# Altium PCB MB1296-STM32_LRA_Disco_revD1.PcbDoc (part 3 of 3)
Units mm, origin at the board's own origin, x right, y up, seen from the top; angles counter-clockwise.
Board outline 65.06 x 95.02 mm, 4 copper layers (Top Layer, GND, VCC, Bottom Layer), stack 1.037 mm thick; 180 components, 128 nets, 710 pads, 1005 vias.
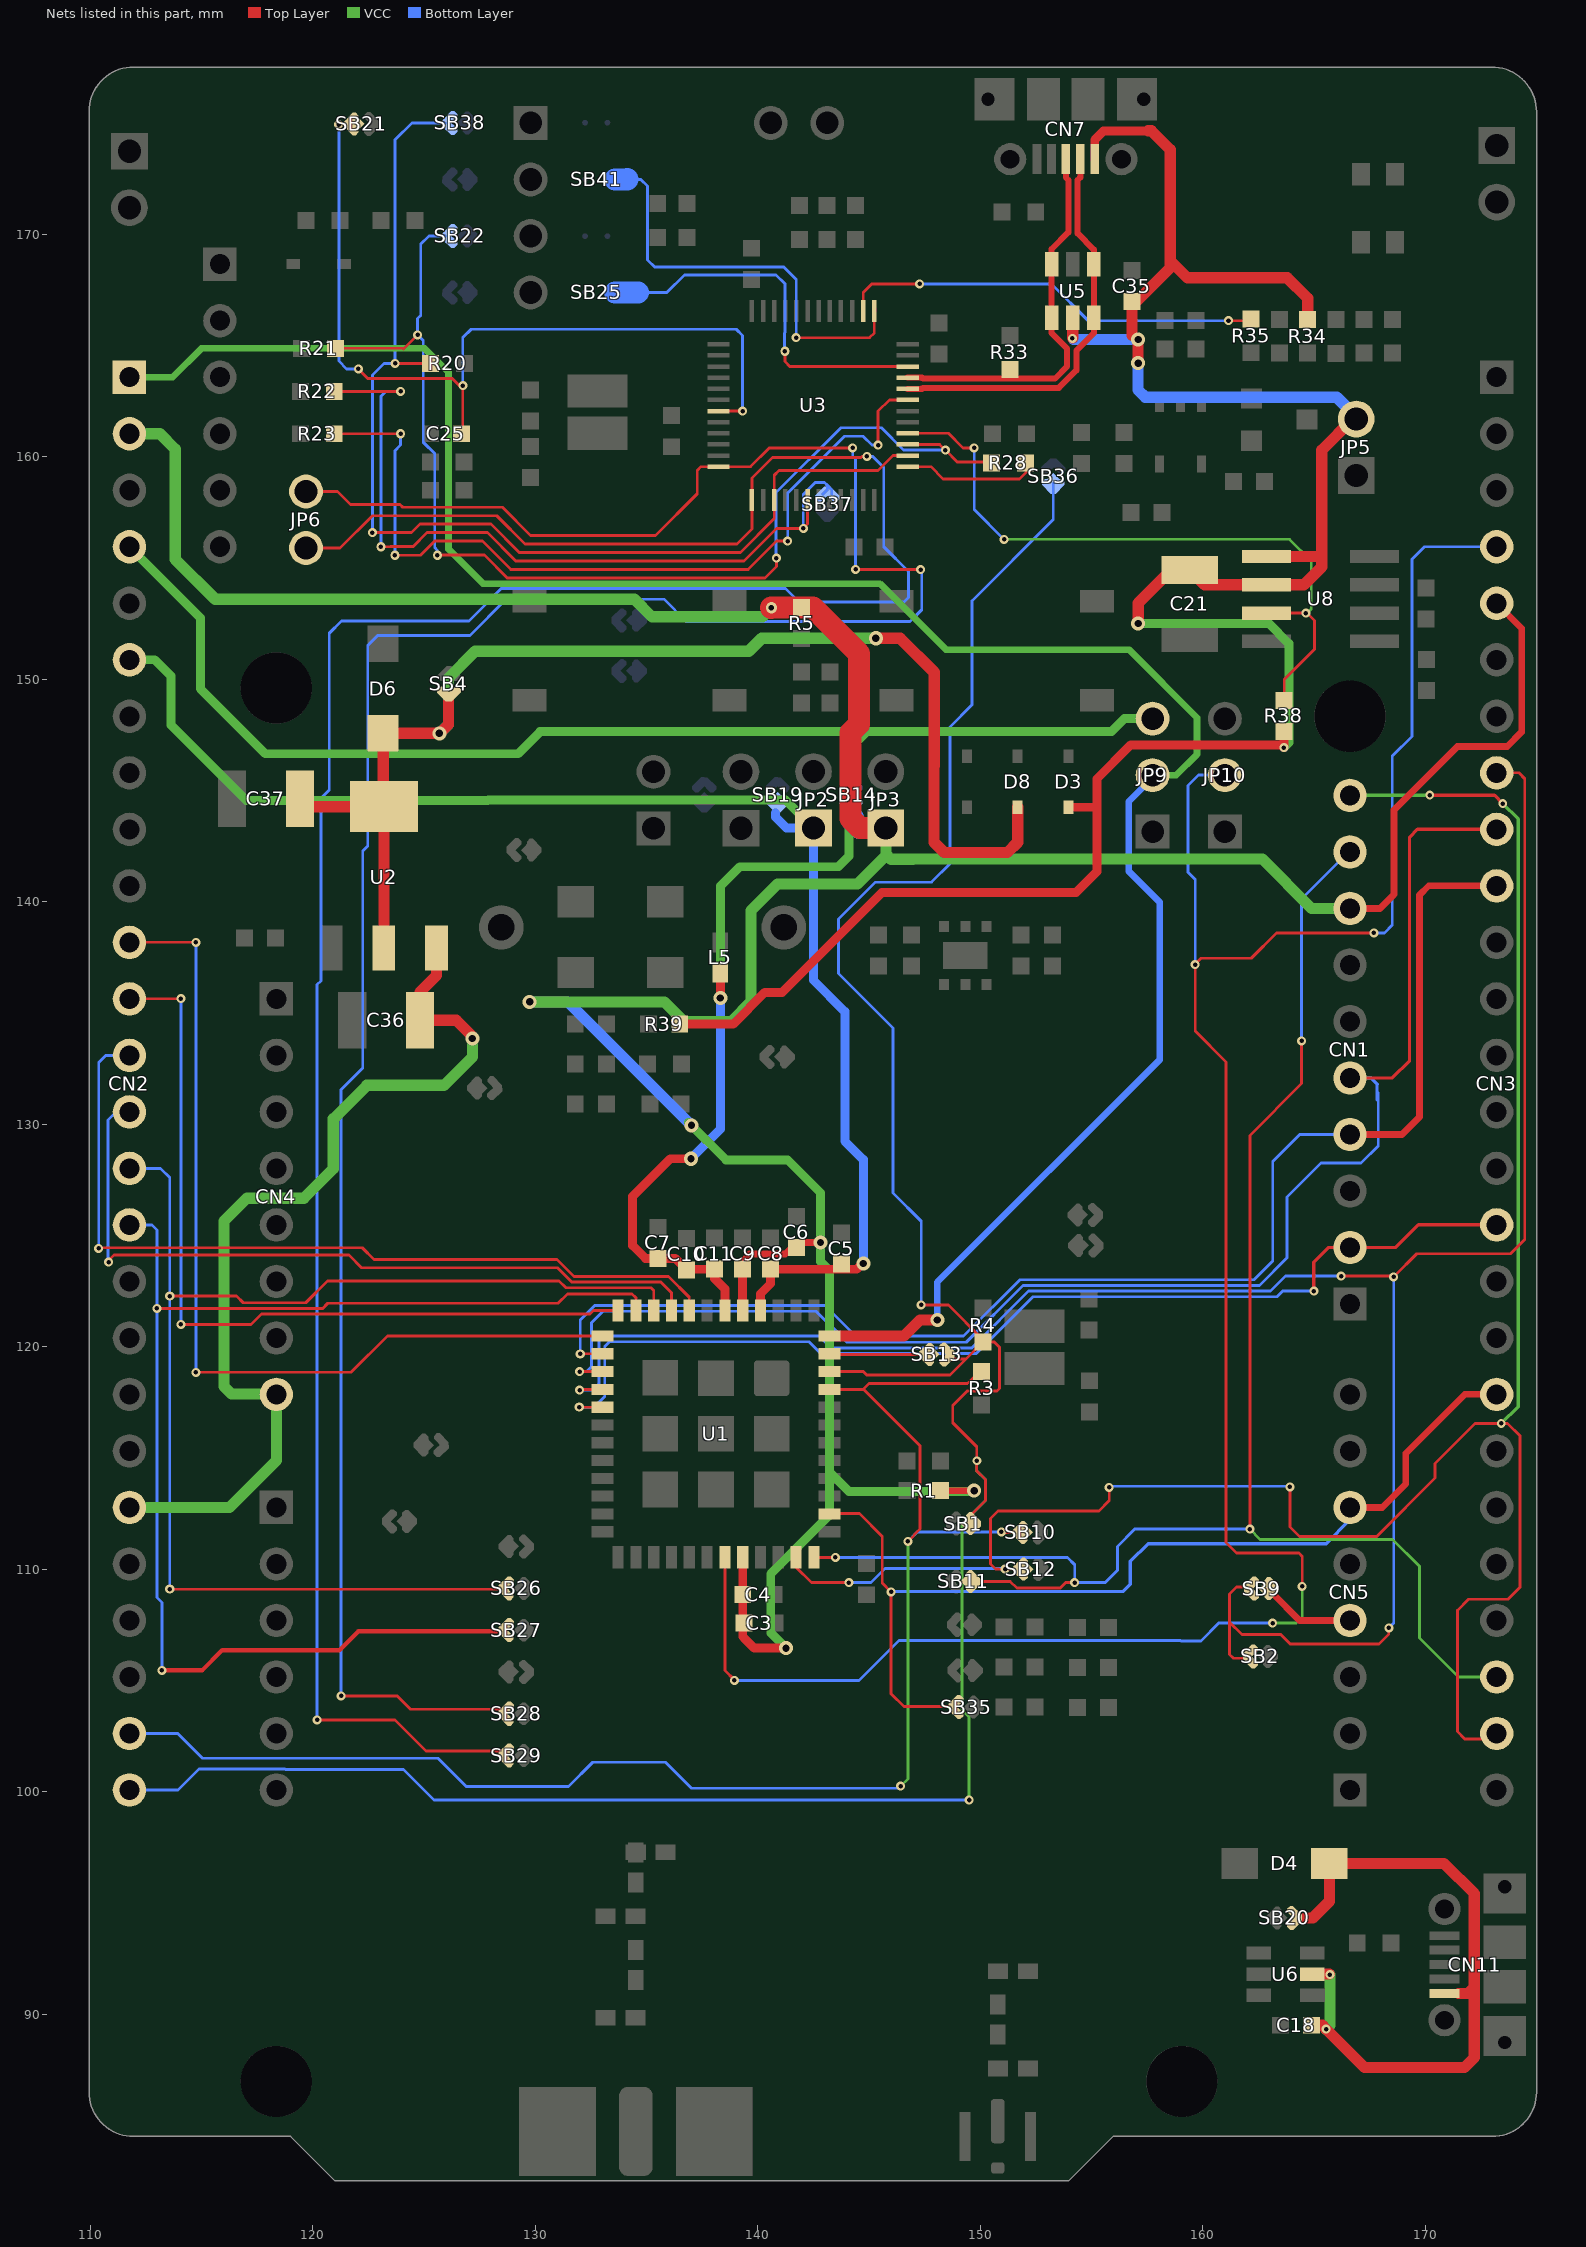
[diagram p5: the nets of this part, all layers, seen from the top]

## Via types
v1: diameter 0.406, hole 0.203, Top Layer to Bottom Layer, tented both sides, 496 vias
v2: diameter 0.5, hole 0.25, Top Layer to Bottom Layer, tented both sides, 413 vias
v3: diameter 0.635, hole 0.33, Top Layer to Bottom Layer, tented both sides, 53 vias
v4: diameter 0.4, hole 0.203, Top Layer to Bottom Layer, tented both sides, 43 vias

## Nets (pads, with @x,y where several pads share a name; then routed paths per layer and width w, separated by ;. In a path a pad name is that pad's centre, name@x,y a point inside that pad or via, vN(x,y) a via of type N, cw(c..) or ccw(c..) an arc to the next point about the centre after c; other vN are vias at no path point) (continued)
PB7: CN3.19 CN5.6 SB35.1 U1.38 | length 45.1
  Top Layer w0.127: U1.38@143.227,112.481 143.246,112.5 144.575,112.5 145.6,111.475 145.6,109.375 v1(146,108.975) 146,104.4 146.575,103.825 SB35.1@148.74,103.825
  Top Layer w0.3: CN5.6@166.624,112.776 168.073,112.776 169.136,113.839 169.136,115.211 171.781,117.856 CN3.19@172.725,117.856
  Bottom Layer w0.15: v1@146.02,108.995 156.42,108.995 156.75,109.325 156.75,110.35 157.55,111.15 165.55,111.15 166.624,112.224 CN5.6@166.624,112.776
PB8: CN1.10 CN3.25 SB12.2 U1.35 | length 95.8
  Top Layer w0.127: U1.35@141.727,110.531 141.727,110.089 142.416,109.4 v1(144.1,109.4) ; 150.852,110 v1(151.125,110) 151.65,110 151.818,110.168 SB12.2@151.818,110.178 ; 150.852,110.006 150.684,110.006 150.46,110.23 150.46,112.27 150.81,112.62 155.34,112.62 155.8,113.08 v1(155.8,113.675) v1@155.8,113.725 ; v1(163.925,113.7) 163.925,111.9 164.35,111.475 167.825,111.475 170.45,114.1 170.45,114.75 172.25,116.55 v4(173.425,116.55) 173.71,116.55 174.26,116 174.26,109.19 173.72,108.65 171.95,108.65 171.45,108.15 171.45,102.7 171.785,102.365 CN3.25@172.725,102.365
  Top Layer w0.15: v4@170.21,144.78 173.12,144.78 v4(173.49,144.41)
  VCC w0.15: CN1.10@166.634,144.79 v4(170.21,144.79) ; v4(173.425,116.55) 174.18,117.305 174.18,143.72 v4(173.49,144.41)
  Bottom Layer w0.127: v1(144.1,109.4) 145.1,109.4 145.725,110.025 151.1,110.025 v1(151.125,110) ; v1@155.8,113.725 v1@163.925,113.725
PB9: CN1.9 CN3.24 SB11.2 U1.36 | length 75
  Top Layer w0.127: U1.36@142.527,110.531 v1(143.494,110.531) ; SB11.2@149.18,109.45 151.35,109.45 151.65,109.15 153.6,109.15 153.85,109.4 v1(154.25,109.4) ; v1(162.125,111.8) 162.125,129.5 164.45,131.825 v1(164.45,133.75)
  VCC w0.127: v1(162.125,111.8) 162.585,111.34 168.54,111.34 169.75,110.13 169.75,106.9 171.494,105.156 CN3.24@172.725,105.156
  Bottom Layer w0.127: v1(143.494,110.531) 153.919,110.531 154.25,110.2 v1(154.25,109.4) 155.625,109.4 156.175,109.95 156.175,111.025 156.95,111.8 v1(162.125,111.8) ; v1(164.45,133.75) 164.45,140.125 166.565,142.24 CN1.9@166.624,142.24
PB12: CN1.2 CN3.16 U1.17 | length 47.7
  Top Layer w0.127: v1(131.981,117.281) U1.17@133.027,117.281
  Top Layer w0.15: v1(165,122.5) 165,123.8 165.66,124.46 CN1.2@166.624,124.46 168.685,124.46 169.701,125.476 CN3.16@172.725,125.476
  Bottom Layer w0.127: v1(131.981,117.281) 132.656,117.281 133.129,117.754 133.129,120.004 133.346,120.221 142.304,120.221 142.833,119.692 149.822,119.692 152.378,122.247 163.347,122.247 163.6,122.5 v1(165,122.5)
PB13: CN3.8 SB2.1 SB9.1 U1.16 | length 98.5
  Top Layer w0.127: v1@132.031,118.081 U1.16@133.027,118.081 ; SB9.1@161.915,109.2 161.525,109.2 161.212,108.887 161.212,107.618 ; SB2.1@162.143,105.797 161.94,106 161.375,106 161.212,106.163 161.212,107.618 ; v1(166.225,123.175) 168.625,123.175 169.625,124.175 173.835,124.175 174.48,124.82 174.48,145.53 174.214,145.796 CN3.8@173.22,145.796 ; v1(168.37,107.36) 168.37,107.08 167.921,106.631 163.939,106.631 163.51,107.06 161.77,107.06 161.212,107.618
  Bottom Layer w0.127: v1(132,118.05) 132.575,118.05 132.875,118.35 132.875,120.329 133.021,120.475 142.771,120.475 143.3,119.946 149.622,119.946 152.178,122.501 163.051,122.501 163.725,123.175 v1(166.225,123.175) ; v1(168.37,107.36) 168.59,107.58 v1(168.59,123.14) v1@168.625,123.175
PB13/NC: CN5.4 SB9.2 | length 4
  Top Layer w0.3: SB9.2@163.107,108.947 164.358,107.696 CN5.4@166.624,107.696
PB14: CN1.5 CN3.9 U1.15 | length 66.1
  Top Layer w0.127: v1@132.006,118.881 U1.15@133.027,118.881
  Top Layer w0.15: CN1.5@166.624,132.08 168.53,132.08 169.3,132.85 169.3,142.9 169.656,143.256 CN3.9@172.725,143.256
  Bottom Layer w0.127: v1(132,118.875) 132.3,118.875 132.525,119.1 132.525,121.075 133.046,121.596 142.629,121.596 144.025,120.2 149.372,120.2 151.928,122.755 162.555,122.755 163.8,124 163.8,126.725 165.325,128.25 167.125,128.25 167.894,129.019 167.894,131.05 ; 167.842,131.8 167.842,131.102 167.894,131.05 ; 167.894,131.406 167.894,131.05
  Bottom Layer w0.15: CN1.5@166.624,132.08 167.562,132.08 167.842,131.8
PB15: CN1.4 CN3.10 U1.14 | length 60.9
  Top Layer w0.127: v1(132.025,119.681) U1.14@133.027,119.681
  Top Layer w0.3: CN1.4@166.624,129.54 168.965,129.54 169.75,130.325 169.75,140.3 170.166,140.716 CN3.10@172.725,140.716
  Bottom Layer w0.127: v1(132.025,119.681) 132.025,121.2 132.675,121.85 143.025,121.85 144.394,120.481 149.256,120.481 151.784,123.009 162.309,123.009 163.155,123.855 163.155,128.33 164.365,129.54 CN1.4@166.624,129.54
PH0: CN2.26 R4.2 SB1.2 SB13.1 SB36.2 U1.46 | length 122.1
  Top Layer w0.127: U1.46@143.227,118.881 144.744,118.881 144.9,118.725 148.639,118.725 149.367,119.453 ; v1(147.35,121.875) 148.575,121.875 150.12,120.33 R4.2@150.12,120.206 ; SB13.1@148.509,119.453 149.367,119.453 ; SB1.2@149.18,112.05 149.202,112.05 150.239,113.087 150.239,114.031 149.85,114.42 v4(149.85,114.875) 149.85,115.5 148.77,116.58 148.77,117.36 149.42,118.01 150.76,118.01 150.865,118.115 150.865,119.974 150.633,120.206 R4.2@150.12,120.206 ; 149.367,119.453 R4.2@150.12,120.206
  VCC w0.127: v4(149.5,99.625) 149.5,103.35 149.18,103.67 149.18,112.028 150.239,113.087 150.239,114.031 149.85,114.42 v4(149.85,114.875)
  Bottom Layer w0.127: CN2.26@111.76,100.076 113.951,100.076 114.892,101.017 118.754,101.017 118.77,101 124.075,101 125.45,99.625 v4(149.5,99.625) ; v1(147.35,121.875) 147.35,125.64 146.08,126.91 146.08,134.32 143.63,136.77 143.63,139.22 145.29,140.88 147.814,140.88 148.641,141.707 148.641,147.857 149.64,148.856 149.64,153.526 153.289,157.175 SB36.2@153.289,158.801
PH1: CN2.25 R3.2 SB10.2 U1.45 | length 68.5
  Top Layer w0.127: U1.45@143.227,118.081 144.731,118.081 ; v1(146.75,111.25) 147.3,111.8 147.3,115.55 144.769,118.081 144.731,118.081 ; R3.2@150.067,118.988 149.43,118.35 145,118.35 144.731,118.081 ; v1(150.95,111.675) 150.975,111.65 SB10.2@151.92,111.65
  VCC w0.127: v4(146.425,100.25) 146.75,100.575 v1(146.75,111.25)
  Bottom Layer w0.127: CN2.25@111.76,102.616 113.934,102.616 115.05,101.5 125.635,101.5 126.9,100.235 131.5,100.235 132.584,101.319 135.859,101.319 137.027,100.15 146.325,100.15 v4(146.425,100.25) ; v1(146.75,111.25) 147.175,111.675 v1(150.95,111.675)
PWR_ENN: R38.1 U3.28 U8.3 | length 31.1
  Top Layer w0.127: U3.28@146.744,161.056 148.57,161.056 149.225,160.401 v1(149.733,160.401) ; U8.3@162.875,152.975 164.695,152.975 165.03,152.64 165.03,151.35 163.67,149.99 163.67,148.938 R38.1@163.688,148.92
  VCC w0.127: v4(151.08,156.29) 163.9,156.29 164.88,155.31 164.88,153.16 v4@164.695,152.975
  Bottom Layer w0.127: v1(149.733,160.401) 149.733,157.637 v4(151.08,156.29)
  other v4: 164.64,152.975
STLINK_RX: JP6.1 SB29.1 U3.13 | length 121.7
  Top Layer w0.127: JP6.1@119.7,155.9 121.229,155.9 122.682,157.353 128.27,157.353 129.54,156.083 139.065,156.083 139.744,156.762 U3.13@139.744,158.056 139.744,159.044 140.667,159.967 144.647,159.967 144.7,160.02 ; v1(120.2,103.225) 123.7,103.225 125.1,101.825 SB29.1@128.7,101.825
  Bottom Layer w0.127: v1(120.2,103.225) 120.2,136.274 120.369,136.443 120.369,144.65 120.744,145.025 120.744,152.069 121.3,152.625 127.025,152.625 128.478,154.077 141.247,154.077 141.85,153.475 146.575,153.475 146.775,153.675 146.775,154.85 145.669,155.956 145.669,159.512 145.174,160.007 144.92,160.007 v1(144.907,160.02)
STLINK_TX: JP6.2 SB28.1 U3.12 | length 119.7
  Top Layer w0.127: JP6.2@119.7,158.44 121.121,158.44 121.7,157.861 123.923,157.861 124.05,157.734 128.524,157.734 129.794,156.464 135.412,156.464 137.287,158.339 137.287,159.385 137.458,159.556 U3.12@138.244,159.556 139.675,159.556 140.52,160.401 v1(144.272,160.401) ; v1(121.275,104.3) 123.8,104.3 124.397,103.703 SB28.1@128.7,103.703 ; v1(144.399,154.94) v1@147.31,154.94
  Bottom Layer w0.127: v1(121.275,104.3) 121.275,131.55 122.25,132.525 122.25,142.275 122.475,142.5 122.475,151.525 122.921,151.971 127.071,151.971 128.7,153.6 135.782,153.6 136.779,152.603 146.853,152.603 147.375,153.125 147.375,154.875 v1(147.325,154.925) ; v1(144.272,160.401) 144.272,160.02 144.399,159.893 v1(144.399,154.94)
STM_JTCK: SB41.2 U3.37 | length 20
  Top Layer w0.127: v1(141.732,165.354) 145.034,165.354 145.244,165.564 U3.37@145.244,166.556 ; U3.37@145.288,166.556 U3.37@145.288,166.624
  Bottom Layer w0.127: SB41.2@133.299,172.466 134.747,172.466 135.049,172.164 135.049,168.851 135.375,168.525 141.175,168.525 141.732,167.968 v1(141.732,165.354)
  Bottom Layer w1: 133.604,172.466 134.133,172.47
STM_JTMS: SB25.2 U3.34 | length 18.6
  Top Layer w0.127: v1(141.224,164.745) 141.224,164.276 141.444,164.056 U3.34@146.744,164.056
  Bottom Layer w0.127: SB25.2@133.299,167.386 135.915,167.386 136.704,168.175 140.825,168.175 141.224,167.776 141.224,165.582 141.211,165.57 141.211,164.757 v1(141.224,164.745)
  Bottom Layer w1: 133.604,167.386 134.616,167.39
STM_RST: C25.2 SB21.2 U3.7 | length 39
  Top Layer w0.127: v1(121.165,174.935) 121.58,174.935 SB21.2@121.733,174.782 ; v1(122.05,163.95) 122.475,163.525 126.275,163.525 126.605,163.195 v1(126.746,163.195) 126.746,161.1 C25.2@126.682,161.036 ; U3.7@138.176,162.052 v1(139.319,162.052)
  Bottom Layer w0.127: v1@121.175,174.905 121.175,164.3 121.525,163.95 v1(122.05,163.95) ; v1(126.746,163.195) 126.746,165.354 127.127,165.735 139.04,165.735 139.319,165.456 v1(139.319,162.052)
STSAFE_NRST: CN3.4 JP10.2 U1.31 | length 105.4
  Top Layer w0.127: U1.31@138.527,110.531 138.527,105.45 138.95,105.027 v1(138.95,105) ; v1(164.475,109.225) 164.475,110.575 164.325,110.725 161.525,110.725 161.05,111.2 161.05,132.8 159.668,134.182 159.668,137.193 159.935,137.46 162.185,137.46 163.325,138.6 v4(167.7,138.6)
  VCC w0.127: v1(163.15,107.575) 164.225,107.575 164.475,107.825 v1(164.475,109.225)
  Bottom Layer w0.127: v1(138.95,105) 144.55,105 146.35,106.8 159,106.8 159.025,106.775 159.925,106.775 160.725,107.575 v1(163.15,107.575) ; v1@159.668,137.125 v1(159.668,137.175) 159.668,141.008 159.35,141.325 159.35,145.225 159.815,145.69 JP10.2@161,145.69 ; v4(167.7,138.6) 168.175,138.6 168.525,138.95 168.525,146.55 169.406,147.431 169.406,155.396 169.966,155.956 CN3.4@172.725,155.956
SX1276_DIO0: CN2.11 U1.13 | length 41.3
  Top Layer w0.127: CN2.11@111.76,138.176 v1(114.75,138.175) ; v1(114.75,118.85) 121.725,118.85 123.356,120.481 U1.13@133.027,120.481
  Bottom Layer w0.127: v1(114.75,118.85) v1(114.75,138.175)
SX1276_DIO1: CN2.12 U1.12 | length 36.8
  Top Layer w0.127: CN2.12@111.76,135.636 v1@113.989,135.636 ; v1(114.075,121) 117.225,121 117.692,121.467 132.461,121.467 132.625,121.631 U1.12@133.727,121.631
  Bottom Layer w0.127: v1(114.075,121) v1@114.075,135.625
  other v1: 114.075,135.65
SX1276_DIO2: CN2.13 U1.8 | length 38
  Top Layer w0.127: v1@110.3,124.425 110.325,124.45 122.225,124.45 122.75,123.925 130.984,123.925 131.749,123.16 135.99,123.16 136.927,122.223 U1.8@136.927,121.631
  Bottom Layer w0.127: v1(110.38,124.42) 110.38,132.78 110.696,133.096 CN2.13@111.76,133.096
SX1276_DIO3: CN2.14 U1.9 | length 34.6
  Top Layer w0.127: v1@110.75,123.8 111.075,124.125 121.625,124.125 122.2,123.55 131,123.55 131.644,122.906 135.644,122.906 136.127,122.423 U1.9@136.127,121.631
  Bottom Layer w0.127: v1@110.694,123.856 v1@110.75,123.8 ; v1@110.8,123.8 110.8,130.19 111.166,130.556 CN2.14@111.76,130.556
  other v1: 110.83,123.8
SX1276_DIO4: CN2.15 SB26.1 U1.10 | length 58.7
  Top Layer w0.127: v1(113.575,109.1) 128.531,109.1 SB26.1@128.7,108.932 ; v1(113.575,122.275) 116.575,122.275 116.875,121.975 119.689,121.975 120.672,122.958 131.075,122.958 131.381,122.652 135.202,122.652 135.327,122.527 U1.10@135.327,121.631
  Bottom Layer w0.127: CN2.15@112.1,128.016 113.159,128.016 113.575,127.6 v1(113.575,122.275) v1(113.575,109.1)
SX1276_DIO5: CN2.16 SB27.1 U1.11 | length 59.9
  Top Layer w0.127: v1@113,121.721 120.45,121.721 120.679,121.95 131.025,121.95 131.45,122.375 134.352,122.375 134.527,122.2 U1.11@134.527,121.631
  Top Layer w0.2: v1(113.225,105.45) 115.025,105.45 115.925,106.35 121.2,106.35 122.05,107.2 128.012,107.2 128.553,107.2 SB27.1@128.7,107.053
  Bottom Layer w0.127: CN2.16@111.76,125.476 112.774,125.476 113,125.25 v1(113,121.725) 113,108.725 113.225,108.5 v1(113.225,105.45)
T_JTCK: R20.1 SB38.1 U3.15 U3.26 | length 50.5
  Top Layer w0.127: v1(122.682,156.591) 124.444,156.591 124.825,156.972 128.016,156.972 129.286,155.702 139.223,155.702 140.744,157.223 U3.15@140.744,158.056 140.744,159.169 140.96,159.385 145.415,159.385 146.086,160.056 U3.26@146.744,160.056 ; v1(123.7,164.2) R20.1@125.585,164.2
  Bottom Layer w0.127: v1(122.682,156.591) 122.682,163.682 123.2,164.2 v1(123.7,164.2) 123.7,174.25 124.456,175.006 SB38.1@125.95,175.006
T_JTMS: R21.1 R28.2 SB22.1 U3.27 | length 52.4
  Top Layer w0.127: R21.1@121.025,164.875 124.108,164.875 ; 124.079,164.846 124.108,164.875 ; v1(124.714,165.481) 124.108,164.875 ; v1(125.603,155.575) 125.616,155.588 127.718,155.588 128.747,154.559 140.335,154.559 140.843,155.067 v1(140.843,155.448) ; U3.27@146.744,160.556 148.181,160.556 v1(148.435,160.302) 148.971,159.766 R28.2@150.685,159.766
  Bottom Layer w0.127: v1(125.603,155.575) 125.588,155.59 125.588,155.814 125.489,155.912 125.489,160.134 124.968,160.655 124.968,165.227 v1(124.714,165.481) 124.714,166.212 124.854,166.352 124.854,169.558 125.222,169.926 SB22.1@125.959,169.926 ; v1(140.843,155.448) 140.83,155.461 140.83,158.387 143.746,161.303 145.56,161.303 146.561,160.302 v1(148.435,160.302)
T_NRST: R22.1 SB37.1 U3.18 | length 36.3
  Top Layer w0.127: R22.1@120.968,162.941 v1(123.952,162.941) ; v1(123.063,155.956) 123.49,155.956 123.502,155.969 124.519,155.969 125.141,156.591 127.858,156.591 129.128,155.321 139.381,155.321 140.843,156.784 v1(142.052,156.784) 142.244,156.976 U3.18@142.244,158.056
  Bottom Layer w0.127: v1(123.063,155.956) 123.076,155.969 123.076,162.724 123.292,162.941 v1(123.952,162.941) ; v1(142.052,156.784) 142.052,158.308 142.591,158.847 143,158.847 143.129,158.718 ; SB37.1@142.926,158.318 143.129,158.521 143.129,158.718 ; SB37.1@143.332,158.318 143.332,158.515 143.129,158.718
T_SWDIO_IN: R28.1 U3.25 | length 6.1
  Top Layer w0.127: U3.25@146.744,159.556 147.784,159.556 148.336,159.004 151.765,159.004 152.082,159.321 R28.1@152.082,159.766
T_SWO: R23.1 U3.31 | length 38
  Top Layer w0.127: R23.1@120.968,161.036 v1(123.952,161.036) ; v1(123.698,155.575) 124.85,155.575 125.485,156.21 127.635,156.21 128.905,154.94 139.573,154.94 140.843,156.21 v1(141.351,156.21) ; v1(145.415,160.528) 145.415,162.052 145.919,162.556 U3.31@146.744,162.556
  Bottom Layer w0.127: v1(123.698,155.575) 123.698,160.274 123.952,160.528 v1(123.952,161.036) ; v1(141.351,156.21) 141.351,158.369 143.904,160.922 144.742,160.922 145.135,160.528 v1(145.415,160.528)
TCXO_OUT: SB13.2 U1.47 | length 4.5
  Top Layer w0.127: U1.47@143.227,119.681 143.252,119.656 SB13.2@147.722,119.656
TCXO_VCC: CN2.1 JP9.2 U1.48 | length 98.2
  Top Layer w0.5: U1.48@143.575,120.481 146.581,120.481 147.3,121.2 v3(148.075,121.2)
  VCC w0.3: CN2.1@111.76,163.576 113.701,163.576 115,164.875 125.025,164.875 126.1,163.8 126.1,155.85 127.65,154.3 145.492,154.3 148.461,151.33 156.69,151.33 159.75,148.27 159.75,146.625 158.815,145.69 JP9.2@158.125,145.69
  Bottom Layer w0.3: v3(148.075,121.2) 148.075,122.9 158.08,132.905 158.08,139.97 156.675,141.375 156.675,144.495 JP9.2@157.87,145.69
U5V: C21.1 C35.2 CN7.1 D3.1 JP5.2 R34.1 R38.2 R39.2 U5.5 U8.1 U8.2 | length 107.1
  Top Layer w0.4: R39.2@136.499,134.5 138.9,134.5 140.325,135.925 141.101,135.925 145.597,140.42 154.314,140.42 155.245,141.351 155.245,145.517 156.778,147.05 163.525,147.05 v4(163.65,146.925) R38.2@163.65,147.652 ; D3.1@153.975,144.247 155.092,144.247 ; CN7.1@155.15,173.375 155.15,174.25 155.55,174.65 157.55,174.65
  Top Layer w0.508: v1@154.164,165.339 U5.5@154.164,166.251 ; 156.825,165.45 C35.2@156.825,166.977 ; C35.2@156.956,166.908 158.539,168.491 158.539,168.825 ; v3(157.099,164.211) v3@157.099,165.176 ; v3(157.1,152.51) 157.1,153.42 158.589,154.909 C21.1@159.425,154.909 160.089,154.245 U8.2@162.875,154.245 164.545,154.245 165.36,155.06 165.36,155.56 ; 157.55,174.65 157.7,174.65 158.539,173.811 158.539,168.825 ; U8.1@162.875,155.515 165.315,155.515 165.36,155.56 ; R34.1@164.719,166.179 164.719,167.132 163.807,168.044 159.32,168.044 158.539,168.825 ; JP5.2@167.005,161.696 166.751,161.696 165.36,160.305 165.36,155.56
  VCC w0.4: v3(157.1,152.51) 162.97,152.51 163.875,151.605 163.875,147.15 v4(163.65,146.925)
  Bottom Layer w0.508: v1@154.2,165.275 v3(157.1,165.275) ; v3(157.099,164.211) 157.099,163.001 157.425,162.675 166.026,162.675 JP5.2@167.005,161.696
  other v1: 154.15,165.325
USB_LRA_5V: C18.2 CN11.1 D4.1 SB20.1 U6.5 | length 30
  Top Layer w0.508: 164.6,94.325 164.95,94.325 165.7,95.075 D4.1@165.7,96.775 170.853,96.775 172.213,95.416 172.213,91.213 ; C18.2@164.898,89.5 165.375,89.5 v1(165.55,89.325) 167.275,87.6 171.764,87.6 172.213,88.048 172.213,91.213 ; U6.5@164.925,91.8 v1@165.7,91.8 ; CN11.1@171.5,90.925 171.925,90.925 172.213,91.213
  VCC w0.508: v1(165.55,89.325) 165.725,89.5 v1(165.725,91.775)
USB_RENUMN: R35.1 U3.38 | length 19.1
  Top Layer w0.127: U3.38@144.744,166.556 144.744,167.386 145.125,167.767 v1@147.275,167.767 ; v1(161.163,166.116) 162.115,166.116 R35.1@162.179,166.179
  Bottom Layer w0.127: v1@147.275,167.767 153.208,167.767 154.859,166.116 v1(161.163,166.116)
  other v1: 147.275,167.775
"USB_STLK _N": CN7.2 U3.32 U5.1 U5.6 | length 18.1
  Top Layer w0.27: U3.32@146.744,163.056 147.382,163.056 147.424,163.097 153.54,163.097 154.325,163.883 154.325,164.77 155.114,165.559 U5.6@155.114,166.251 U5.1@155.114,168.651 155.114,169.311 154.383,170.041 154.383,172.442 154.5,172.558 CN7.2@154.5,173.375
"USB_STLK _P": CN7.3 R33.2 U3.33 U5.3 U5.4 | length 17.7
  Top Layer w0.127: 153.719,165.155 153.9,164.974 153.9,164.924
  Top Layer w0.27: U3.33@146.744,163.556 147.382,163.556 147.424,163.514 153.367,163.514 153.9,164.048 153.9,164.873 153.214,165.559 U5.4@153.214,166.251 U5.3@153.214,168.651 153.214,169.339 153.966,170.091 153.966,172.442 153.85,172.558 CN7.3@153.85,173.375
VDD_MCU_LRA: C3.2 C4.2 C6.1 C9.2 CN1.8 CN2.2 CN3.5 JP3.1 R1.2 R5.2 SB14.2 U1.5 U1.32 | length 174.4
  Top Layer w0.3: C9.2@139.327,123.483 139.327,123.856 139.635,124.164 141.239,124.164 141.757,124.682 v3(142.825,124.682) ; R1.2@148.227,113.531 v3(149.731,113.531) ; CN1.8@166.624,139.7 167.97,139.7 168.6,140.33 168.6,144.13 171.45,146.98 173.69,146.98 174.34,147.63 174.34,152.296 CN3.5@173.22,153.416
  Top Layer w0.4: U1.5@139.327,121.631 C9.2@139.327,123.483 ; 139.329,106.969 U1.32@139.329,110.531 ; 139.377,106.921 139.848,106.45 v3(141.275,106.45)
  Top Layer w1: v2(140.614,153.213) 140.625,153.224 R5.2@141.975,153.224 142.479,153.224 144.551,151.151 144.551,147.978 144.17,147.597 144.17,143.739 144.599,143.31 JP3.1@145.76,143.31
  VCC w0.4: v3@136.9,130.075 138.583,128.392 141.348,128.392 142.825,126.915 v3(142.825,124.682) 142.825,123.832 143.227,123.43 143.227,114.373 ; v3(141.275,106.45) 140.59,107.135 140.59,109.79 143.227,112.427 143.227,114.373 ; v3@149.7,113.5 144.1,113.5 143.227,114.373
  VCC w0.5: v3(129.75,135.5) 135.818,135.5 136.693,134.625 138.815,134.625 139.7,135.51 139.7,139.6 140.9,140.8 144.48,140.8 145.76,142.08 145.76,142.149 ; JP3.1@145.76,143.31 145.76,142.149 ; CN1.8@166.624,139.7 164.897,139.7 162.684,141.913 146.99,141.91 145.999,141.91 145.76,142.149
  VCC w0.508: CN2.2@111.76,161.036 113.132,161.036 113.817,160.35 113.817,155.397 115.621,153.594 134.468,153.594 135.255,152.806 140.208,152.806 v2(140.614,153.213)
  Bottom Layer w0.5: v3(129.75,135.5) 131.475,135.5 v3@136.9,130.075
  Bottom Layer w1: 144.272,143.764 144.272,143.637 144.599,143.31 JP3.1@145.76,143.31
  other v3: 137.025,129.95
VDD_RF_LRA: C7.1 C10.2 C11.2 CN2.4 JP9.3 L5.2 U1.6 | length 90.7
  Top Layer w0.4: v3(137,128.45) 136.07,128.45 134.38,126.76 134.38,124.55 134.959,123.971 C7.1@135.51,123.971 136.288,123.971 C10.2@136.802,123.458 136.827,123.483 C11.2@138.052,123.483 138.052,123.073 138.527,122.598 U1.6@138.527,121.631 ; v3(138.325,135.675) L5.2@138.325,136.829
  VCC w0.4: CN2.4@111.76,155.956 114.95,152.766 114.95,149.575 117.875,146.65 129.23,146.65 130.225,147.645 144.91,147.645 ; v3(138.325,135.675) 138.325,140.7 139.2,141.575 143.625,141.575 144.11,142.06 144.11,146.845 144.91,147.645 ; JP9.3@158.125,148.23 156.485,148.23 155.9,147.645 144.91,147.645
  Bottom Layer w0.4: v3(137,128.45) 138.325,129.775 v3(138.325,135.675)
VDD_USB_LRA: C5.1 C8.2 CN2.6 JP2.1 SB19.2 U1.4 | length 64.6
  Top Layer w0.4: U1.4@140.127,121.631 140.127,122.381 140.577,122.831 C8.2@140.577,123.483 144.454,123.483 v3@144.73,123.759 ; JP2.1@142.51,143.31 JP2.1@142.51,143.83
  VCC w0.4: CN2.6@111.76,150.876 112.899,150.876 113.625,150.15 113.625,147.95 117.03,144.545 127.87,144.545 127.9,144.575 141.245,144.575 JP2.1@142.51,143.31
  Bottom Layer w0.4: 140.8,144 140.8,143.813 141.303,143.31 JP2.1@142.51,143.31 142.51,136.47 143.919,135.061 143.919,129.241 144.75,128.41 v3(144.75,123.74)
VIN: C36.1 CN2.21 CN4.8 U2.3 | length 42.2
  Top Layer w0.5: U2.3@125.562,137.075 125.562,136.687 124.824,135.949 C36.1@124.824,134.675 126.45,134.675 127.175,133.95 v3(127.175,133.85)
  VCC w0.5: CN2.21@111.76,112.776 116.251,112.776 118.364,114.889 CN4.8@118.364,117.856 ; CN4.8@118.35,117.87 116.36,117.87 116.02,118.21 116.02,125.645 117.05,126.675 119.6,126.675 120.925,128 120.925,130.246 122.429,131.75 125.9,131.75 127.175,133.025 v3(127.175,133.85)
VIN_REG_5V: C37.1 D6.1 D8.1 SB4.1 U2.2 | length 56.9
  Top Layer w0.508: C37.1@119.424,144.625 119.774,144.275 U2.2@123.2,144.275 ; U2.2@123.2,137.925 U2.2@123.2,144.275 ; 126.1,149 126.1,147.975 v3(125.692,147.567) D6.1@123.165,147.567 123.165,144.31 U2.2@123.2,144.275 ; v3(145.313,151.841) 146.406,151.841 147.934,150.313 147.934,146.105 147.93,146.101 147.93,142.672 148.387,142.215 151.232,142.215 151.689,142.672 D8.1@151.689,144.247
  VCC w0.508: v3(125.692,147.567) 126.1,147.975 126.1,150.054 127.303,151.257 139.598,151.257 140.183,151.841 v3(145.313,151.841)
pads on no net: U3.4 U3.11 U3.14 U3.16 U3.17 U3.19 U3.21 U3.22 U3.40 U3.41 U3.42 U3.43 U3.45 U3.46 U7.3 U7.5

## Polygon pours and split planes (outlines as drawn)
GND on Top Layer "GND-Top" (solid, remove dead copper, pour order 5): 107.5,82.5 177.5,82.5 177.5,90 177.5,177.5 107.494,177.5 107.494,82.5 107.5,82.5
GND on GND "GND" (solid, remove dead copper, pour order 6): 107.5,82.5 177.5,82.5 177.5,90 177.5,177.5 107.494,177.5 107.494,82.5 107.5,82.5
GND on VCC "GND-VCC" (solid, remove dead copper, pour order 7): 107.493,82.5 177.492,82.5 177.492,90 177.492,177.5 107.487,177.5 107.487,82.5 107.493,82.5
GND on Bottom Layer "GND-Bot" (solid, remove dead copper, pour order 8): 107.508,82.525 177.508,82.525 177.508,90.025 177.508,177.525 107.502,177.525 107.502,82.525 107.508,82.525

## Keep-outs
Keep-Out Layer:
  lines w0.127: 109.945,86.51 109.945,151.8 ; 109.95,86.501 ccw(c111.95,86.501) 111.95,84.501 ; 109.95,151.809 109.95,175.52 ; 109.95,175.5 cw(c111.95,175.5) 111.95,177.5 173.012,177.5 cw(c173.012,175.5) 175.012,175.5 175.012,151.886 175.012,86.5 ; 111.945,84.5 119.005,84.5 121.005,82.5 153.975,82.5 ; 154,82.5 156,84.5 173.011,84.5 ccw(c173.011,86.5) 175.011,86.5

## Other copper
Top Layer:
  pour cut-out: 151.9,83.425 151.9,85.763 149.65,85.763 149.65,83.425
  pour cut-out: 151.125,89.65 151.125,89.875 150.425,89.875 150.425,89.65
  pour cut-out: 135.075,96.925 135.3,96.925 135.3,97.625 135.075,97.625
  pour cut-out: 134.175,96.7 134.175,96.475 134.875,96.475 134.875,96.7
  pour cut-out: 133.525,121.15 133.525,111.025 142.725,111.025 142.725,121.15
  pour cut-out: 134.175,92.325 134.175,92.1 134.875,92.1 134.875,92.325
  text "1" at 164.834,175.982 h1
  text "TOP LAYER" at 213.264,42.875 h0.8
  text ".GTL" at 213.756,37.875 h0.8
GND:
  text "2" at 166.334,175.982 h1
VCC:
  text "3" at 168.234,175.982 h1
Bottom Layer:
  text "4" at 170.534,175.982 h1
  text "BOTTOM LAYER" at 92.264,42.875 h0.8
  text ".GBL" at 91.772,37.875 h0.8
Multi-Layer:
  pour cut-out: 164.334,177.332 164.334,175.332 171.084,175.332 171.084,177.332

## Silkscreen, mask and mechanical layers (free items; w line width, h text height)
Top Overlay:
  circle w0.254: c169.498,173.558 r0.148
  lines w0.076: 119.888,98.806 121.764,98.806 ; 119.888,114.046 121.764,114.046 121.764,110.72 ; 119.888,116.586 122.74,116.59 ; 119.888,129.032 122.64,129.03 ; 121.764,98.801 121.764,107.526 ; 122.64,127.73 122.64,129.032 ; 122.74,116.585 122.74,123.2
  lines w0.127: 136.775,125.8 136.775,126.875 ; 139.375,125.9 139.375,126.975
  lines w0.203: 112.812,143.199 113.371,142.64 ; 112.89,145.83 113.465,146.405
  lines w0.5: 127.254,166.891 127.254,170.307 128.016,170.307 128.016,166.891 127.254,166.891 ; 127.254,172.212 128.016,172.212 128.016,175.654 127.254,175.654 127.254,172.212
  lines w1: 132.161,167.172 132.733,167.172 132.733,170.22 132.161,170.22 132.161,167.172 ; 132.161,172.404 132.733,172.404 132.733,175.452 132.161,175.452 132.161,172.404
  text "1" at 127.83,176.32 h0.8
  text "USB STLINK" at 158.95,174.11 h0.8
  text "SWD" at 114.79,171.5 h0.8
  text "ST-LINK" at 126.4,169.225 h0.6 r90
  text "DISCOVERY" at 134.225,168.825 h0.6 r90
  text "GND" at 171.704,168.656 h0.8
  text "GND" at 110.85,168.475 h0.8
  text "1" at 117.67,168.3 h0.8
  text "COM" at 168,168.2 h0.6
  text "CRF1" at 168.9,162.9 h0.8
  text "CRF2" at 168.6,160.5 h0.8
  text "CRF3" at 168.6,158.2 h0.8
  text "TX" at 121.3,158 h0.8
  text "RESET" at 148.94,155.17 h1.2
  text "USER" at 132.45,155.09 h1.2
  text "RX" at 121.5,154.6 h0.8
  text "GND" at 113.47,152.99 h0.8
  text "USB" at 113.47,150.36 h0.8
  text "GND" at 113.47,148.15 h0.8
  text "PA5" at 169.47,147.8 h0.8
  text "BOOT0" at 113.47,146.81 h0.8
  text "GND" at 131.45,145.97 h0.8
  text "PB13" at 168.739,145.5 h0.8
  text "D15" at 163.01,144.65 h0.8
  text "1" at 162.62,143.155 h0.8
  text "3V3" at 131.54,142.93 h0.8
  text "PB14" at 168.739,142.92 h0.8
  text "1" at 155.85,141.95 h0.8
  text "D14" at 163.023,141.853 h0.8
  text "1" at 133.54,141.77 h0.8
  text "PA13" at 113.47,141.521 h0.8
  text "1" at 147.75,141.375 h0.8
  text "1" at 137.27,141.18 h0.8
  text "1" at 144.03,140.81 h0.8
  text "PB15" at 168.739,140.42 h0.8
  text "PA14" at 113.47,140.295 h0.8
  text "AVDD" at 162.05,139.35 h0.8
  text "PB6" at 169.405,137.79 h0.8
  text "DIO0" at 113.99,137.23 h0.8 r45
  text "GND" at 162.95,136.775 h0.8
  text "GND" at 169.405,135.57 h0.8
  text "1" at 119.93,135.52 h0.8
  text "DIO1" at 113.47,135.25 h0.8
  text "D13" at 163.04,134.2 h0.8
  text "PA9" at 169.405,132.946 h0.8
  text "DIO2" at 113.47,132.66 h0.8
  text "D12" at 163.075,131.775 h0.8
  text "IOREF" at 120.05,131.72 h0.8
  text "PA12" at 168.739,130.26 h0.8
  text "NRST" at 120.06,130.2 h0.8
  text "DIO3" at 113.47,130.05 h0.8
  text "D11" at 163,129.15 h0.8
  text "PA11" at 169.006,127.93 h0.8
  text "3V3" at 120.058,127.618 h0.8
  text "DIO4" at 113.47,127.54 h0.8
  text "MB1296D" at 148.565,127.54 h1
  text "D10" at 162.975,126.8 h0.8
  text "PB12" at 168.739,125.27 h0.8
  text "5V" at 120.058,125.12 h0.8
  text "DIO5" at 113.47,125.04 h0.8
  text "D9" at 163.375,123.875 h0.8
  text "POWER" at 123.13,123.69 h0.8 r90
  text "GND" at 120.058,122.76 h0.8
  text "PB2" at 169.39,122.58 h0.8
  text "GND" at 113.47,122.51 h0.8
  text "D8" at 163.547,121.608 h0.8
  text "GND" at 120.058,120.18 h0.8
  text "1" at 164.74,120.14 h0.8
  text "NRST" at 113.47,120.01 h0.8
  text "PA8" at 169.405,119.96 h0.8
  text "D7" at 163.526,117.544 h0.8
  text "PB7" at 169.405,117.52 h0.8
  text "3V3" at 113.47,117.42 h0.8
  text "VIN" at 120.058,117.4 h0.8
  text "PWM/D6" at 160.32,115.004 h0.8
  text "PB5" at 169.405,114.952 h0.8
  text "5V" at 113.47,114.92 h0.8
  text "1" at 116.48,113.8 h0.8
  text "PWM/D5" at 160.292,112.464 h0.8
  text "VIN" at 113.47,112.44 h0.8
  text "PA10" at 168.739,112.434 h0.8
  text "A0" at 120.048,112.314 h0.8
  text "D4" at 163.497,109.924 h0.8
  text "PA2" at 169.405,109.93 h0.8
  text "A1" at 120.048,109.774 h0.8
  text "GND" at 113.47,109.76 h0.8
  text "AIN" at 122.26,108.25 h0.8 r90
  text "PA0" at 113.47,107.38 h0.8
  text "PWM/D3" at 160.292,107.384 h0.8
  text "PA3" at 169.405,107.39 h0.8
  text "A2" at 120.048,107.234 h0.8
  text "PB9" at 169.405,104.91 h0.8
  text "D2" at 163.526,104.844 h0.8
  text "PA4" at 113.47,104.77 h0.8
  text "A3" at 120.048,104.694 h0.8
  text "TX/D1" at 161.085,102.3 h0.8
  text "PB8" at 169.405,102.18 h0.8
  text "A4" at 120.048,102.154 h0.8
  text "PH1" at 113.47,102.13 h0.8
  text "GND" at 169.405,99.85 h0.8
  text "www.st.com/stm32app-discovery" at 127.813,99.797 h1
  text "RX/D0" at 160.91,99.775 h0.8
  text "A5" at 120.048,99.614 h0.8
  text "PH0" at 113.47,99.57 h0.8
  text "1" at 164.7,98.68 h0.8
  text "B-L072Z-LRWAN1" at 110.81,95.79 h1
  text "Powered by STM32" at 110.81,93.39 h0.9
  text "All-in-one LoRa(TM) module" at 110.81,91.6 h0.9
  text "USB USER" at 167.73,85.53 h0.8
  text "TOP SILKSCREEN" at 213.264,42.875 h0.8
  text ".GTO" at 213.756,37.875 h0.8
Bottom Overlay:
  drawing of 734 lines, arcs and shapes, not listed
  text "DEFAULT" at 123.13,169.03 h1 r270
  text "RESERVED" at 135.225,168.325 h1 r270
  text "TCXO" at 114.96,161.62 h0.8 r315
  text "MB1296D" at 136.119,160.528 h1
  text "MCO" at 153.025,160.325 h0.8 r270
  text "MCU" at 114.63,159.309 h0.8 r315
  text "NRST" at 142.74,159.01 h0.8 r270
  text "GND" at 114.656,156.845 h0.8 r315
  text "STSAFE NRST" at 171.338,155.558 h0.8
  text "RF" at 114.097,154.686 h0.8 r315
  text "AVDD" at 171.318,153.076 h0.8
  text "GND" at 171.088,150.548 h0.8
  text "D15" at 165.228,144.607 h0.8
  text "D14" at 165.228,141.813 h0.8
  text "AVDD" at 165.228,139.348 h0.8
  text "IOREF" at 120.47,136.92 h0.8
  text "GND" at 165.228,136.808 h0.8
  text "D13" at 165.228,134.31 h0.8
  text "3V3" at 120.775,132.1 h0.8 r315
  text "D12" at 165.228,131.735 h0.8
  text "NRST" at 120.7,129.64 h0.8 r315
  text "D11" at 165.228,129.11 h0.8
  text "D10" at 165.228,126.76 h0.8
  text "3V3" at 120.77,126.67 h0.8 r315
  text "5V" at 120.5,124.3 h0.8 r315
  text "D9" at 165.228,123.835 h0.8
  text "GND" at 120.75,121.78 h0.8 r315
  text "D8" at 165.228,121.568 h0.8
  text "GND" at 120.71,119.09 h0.8 r315
  text "D7" at 165.228,117.504 h0.8
  text "VIN" at 120.71,116.8 h0.8 r315
  text "PWM/D6" at 165.228,114.964 h0.8
  text "PWM/D5" at 165.228,112.424 h0.8
  text "A0" at 120.906,112.021 h0.8
  text "D4" at 165.228,109.884 h0.8
  text "A1" at 120.906,109.481 h0.8
  text "PWM/D3" at 165.228,107.344 h0.8
  text "A2" at 120.906,106.941 h0.8
  text "D2" at 165.228,104.804 h0.8
  text "A3" at 120.906,104.401 h0.8
  text "TX/D1" at 165.228,102.26 h0.8
  text "A4" at 120.88,102.14 h0.8
  text "RX/D0" at 165.228,99.735 h0.8
  text "A5" at 120.91,99.7 h0.8
  text "(c)2017" at 119.99,91.63 h0.8
  text "BOTTOM SILKSCREEN" at 92.264,42.875 h0.8
  text ".GBO" at 91.772,37.875 h0.8
Top Paste:
  text "TOP PASTE" at 213.264,42.875 h0.8
  text ".GTP" at 213.756,37.875 h0.8
Bottom Paste:
  text "BOTTOM PASTE" at 92.264,42.875 h0.8
  text ".GBP" at 91.772,37.875 h0.8
Top Solder:
  text "TOP SOLDER" at 213.264,42.875 h0.8
  text ".GTS" at 213.756,37.875 h0.8
Bottom Solder:
  rectangle: 133.528,174.498 134.544,175.539
  rectangle: 133.502,171.983 134.417,172.974
  rectangle: 133.502,169.393 134.518,170.434
  rectangle: 133.528,166.853 134.544,167.894
  text "BOTTOM SOLDER" at 92.264,42.875 h0.8
  text ".GBS" at 91.772,37.875 h0.8
Mechanical 1:
  lines w0.127: 109.931,86.51 109.95,175.52 ; 109.945,86.51 ccw(c111.945,86.51) 111.945,84.51 ; 109.95,175.5 cw(c111.95,175.5) 111.95,177.5 173.01,177.5 cw(c173.01,175.5) 175.01,175.5 ; 111.945,84.5 119.005,84.5 121.005,82.5 153.975,82.5 155.975,84.5 173.011,84.5 ccw(c173.011,86.5) 175.011,86.5 ; 175.011,86.475 175.022,151.968 175.022,175.5
Mechanical 2:
  circle w0.254: c287.446,38.314 r1.3
  circle w0.2: c152.764,45.939 r3.442
  circle w0.2: c152.764,45.939 r1.922
  circle w0.2: c152.764,215.894 r3.442
  circle w0.2: c152.764,215.894 r1.922
  circle w0.2: c24.264,130.902 r3.442
  circle w0.2: c24.264,130.902 r1.922
  region: 272.968,37.221 262.212,37.221 263.205,39.714 271.063,39.714 271.512,40.473 273.72,37.925
  region: 286.971,45.551 271.444,45.551 270.75,43.775 269.539,42.55 268.142,44.41 268.142,46.061 269.285,47.458 270.721,47.837 286.971,47.837
  lines w0.2: 18.295,130.839 30.297,130.839 ; 24.264,124.806 24.264,136.808 ; 146.795,45.875 158.796,45.875 ; 146.795,215.831 158.796,215.831 ; 152.764,39.843 152.764,51.844 ; 152.764,209.798 152.764,221.8 ; 204.264,35.875 204.264,50.875 291.264,50.875 ; 204.264,40.875 259.264,40.875 ; 204.264,45.875 259.264,45.875 ; 219.66,35.875 219.66,40.875 ; 237.867,35.875 237.867,45.875 ; 249.397,35.875 249.397,40.875 ; 259.264,35.875 259.264,50.875 ; 278.054,37.425 280.39,37.425 ; 14.264,35.875 14.264,225.875 291.264,225.875 291.264,35.875 14.264,35.875
  lines w0.21: 263.205,39.714 271.997,39.714 268.931,43.252 ; 266.558,48.116 262.212,37.221 281.535,37.221 ; 268.298,44.182 273.72,37.925 ; 268.552,44.182 273.857,38.06 ; 268.552,44.436 273.857,38.314 ; 268.65,45.551 281.643,45.551 ; 268.679,44.563 273.984,38.441 ; 268.806,44.69 274.111,38.568 ; 268.933,44.817 274.238,38.695 ; 269.06,44.944 274.365,38.822 ; 269.115,46.896 274.42,40.775 ; 269.183,49.716 288.633,49.716 284.334,38.938 ; 269.187,45.071 274.438,39.012 ; 269.187,45.325 274.492,39.203 ; 269.187,45.579 274.492,39.457 ; 269.187,46.468 274.492,40.346 ; 269.314,45.706 274.619,39.584 ; 269.314,46.087 274.619,39.965 ; 270.975,47.837 287.739,47.837 286.977,45.551 ; 271.416,44.535 273.781,41.806 ; 278.054,37.425 280.943,45.805 ; 278.276,37.475 281.145,45.796 ; 278.403,37.475 281.272,45.796 ; 278.657,37.475 281.526,45.796 ; 278.911,37.475 281.78,45.796 ; 279.165,37.475 282.034,45.796 ; 279.419,37.475 282.288,45.796 ; 279.673,37.475 282.542,45.796 ; 279.927,37.475 282.796,45.796 ; 280.181,37.475 283.05,45.796 ; 280.39,37.425 283.279,45.805 ; 283.279,45.551 286.971,45.551 ; 286.303,45.553 287.065,47.839 ; 286.469,45.551 287.231,47.837 ; 286.723,45.551 287.485,47.837
  lines w0.254: 266.519,48.084 cw(c268.945,47.113) 269.182,49.716 ; 268.931,43.252 cw(c270.735,45.196) 270.975,47.837 ; 270.686,39.701 ccw(c270.791,40.236) 271.089,40.693 ; 271.416,44.535 cw(c271.746,44.997) 271.772,45.564 ; 272.71,37.313 ccw(c271.977,39.862) 273.781,41.806 ; 281.535,37.221 ccw(c281.783,39.956) 284.333,38.936
  text "Project:" at 205.264,47.405 h0.8
  text "STM32 LRA Disco" at 215.241,47.405 h0.8
  text "Layer:" at 205.264,42.875 h0.8
  text "Ref: MB1296" at 239.205,42.884 h0.8
  text "Gerber:" at 205.264,37.875 h0.8
  text "Size: A4" at 239.205,37.875 h0.8
  text "Date:" at 220.758,37.748 h0.8
  text "18-AUG-2016" at 226.973,37.748 h0.8
  text "Rev: D" at 251.059,37.748 h0.8
  text "R" at 286.938,37.552 h1
Mechanical 3:
  circle w0.254: c18.082,38.314 r1.3
  circle w0.2: c24.264,130.902 r1.922
  circle w0.2: c24.264,130.902 r3.442
  circle w0.2: c152.764,215.894 r1.922
  circle w0.2: c152.764,215.894 r3.442
  circle w0.2: c152.764,45.939 r1.922
  circle w0.2: c152.764,45.939 r3.442
  region: 32.56,37.221 43.316,37.221 42.323,39.714 34.465,39.714 34.016,40.473 31.808,37.925
  region: 18.557,45.551 34.084,45.551 34.778,43.775 35.989,42.55 37.386,44.41 37.386,46.061 36.243,47.458 34.807,47.837 18.557,47.837
  lines w0.2: 14.264,50.875 101.264,50.875 101.264,35.875 ; 18.295,130.839 30.297,130.839 ; 24.264,124.806 24.264,136.808 ; 25.138,37.425 27.474,37.425 ; 46.264,35.875 46.264,50.875 ; 46.264,40.875 101.264,40.875 ; 46.264,45.875 101.264,45.875 ; 56.131,35.875 56.131,40.875 ; 67.661,35.875 67.661,45.875 ; 85.868,35.875 85.868,40.875 ; 146.795,45.875 158.796,45.875 ; 146.795,215.831 158.796,215.831 ; 152.764,39.843 152.764,51.844 ; 152.764,209.798 152.764,221.8 ; 14.264,35.875 291.264,35.875 291.264,225.875 14.264,225.875 14.264,35.875
  lines w0.21: 18.043,47.837 18.805,45.551 ; 18.297,47.837 19.059,45.551 ; 18.463,47.839 19.225,45.553 ; 18.551,45.551 17.789,47.837 34.553,47.837 ; 18.557,45.551 22.249,45.551 ; 21.194,38.938 16.895,49.716 36.345,49.716 ; 22.249,45.805 25.138,37.425 ; 22.478,45.796 25.347,37.475 ; 22.732,45.796 25.601,37.475 ; 22.986,45.796 25.855,37.475 ; 23.24,45.796 26.109,37.475 ; 23.494,45.796 26.363,37.475 ; 23.748,45.796 26.617,37.475 ; 23.885,45.551 36.878,45.551 ; 23.993,37.221 43.316,37.221 38.97,48.116 ; 24.002,45.796 26.871,37.475 ; 24.256,45.796 27.125,37.475 ; 24.383,45.796 27.252,37.475 ; 24.585,45.805 27.474,37.425 ; 30.909,39.584 36.214,45.706 ; 30.909,39.965 36.214,46.087 ; 31.036,39.203 36.341,45.325 ; 31.036,39.457 36.341,45.579 ; 31.036,40.346 36.341,46.468 ; 31.09,39.012 36.341,45.071 ; 31.108,40.775 36.413,46.896 ; 31.163,38.822 36.468,44.944 ; 31.29,38.695 36.595,44.817 ; 31.417,38.568 36.722,44.69 ; 31.544,38.441 36.849,44.563 ; 31.671,38.06 36.976,44.182 ; 31.671,38.314 36.976,44.436 ; 31.747,41.806 34.112,44.535 ; 31.808,37.925 37.23,44.182 ; 36.597,43.252 33.531,39.714 42.323,39.714
  lines w0.254: 21.195,38.936 ccw(c23.745,39.956) 23.993,37.221 ; 31.747,41.806 ccw(c33.551,39.862) 32.818,37.313 ; 33.756,45.564 cw(c33.782,44.997) 34.112,44.535 ; 34.439,40.693 ccw(c34.737,40.236) 34.842,39.701 ; 34.553,47.837 cw(c34.793,45.196) 36.597,43.252 ; 36.346,49.716 cw(c36.583,47.113) 39.009,48.084
  text "STM32 LRA Disco" at 90.286,47.405 h0.8
  text "Project:" at 100.264,47.405 h0.8
  text "Ref: MB1296" at 66.323,42.884 h0.8
  text "Layer:" at 100.264,42.875 h0.8
  text "Size: A4" at 66.323,37.875 h0.8
  text "Gerber:" at 100.264,37.875 h0.8
  text "Rev: D" at 54.469,37.748 h0.8
  text "18-AUG-2016" at 78.555,37.748 h0.8
  text "Date:" at 84.77,37.748 h0.8
  text "R" at 18.59,37.552 h1
Mechanical 11:
  text "Dimensions" at 213.264,42.875 h0.8
  text ".GM11" at 213.756,37.875 h0.8
Drill Drawing:
  text "DRILL DRAWING" at 213.264,42.875 h0.8
  text ".Legend" at 19.264,40.875 h0.8
  text ".DRL" at 213.756,37.875 h0.8

## Dimensions
109.494,177.536 to 121.005,82.5 on Drill Drawing
109.95,175.52 to 175.022,151.968 on Drill Drawing
166.624,117.856 to 166.624,121.92 on Mechanical 1
118.364,112.776 to 118.364,117.856 on Mechanical 1
166.624,144.78 to 166.624,148.336 on Mechanical 1

## Text inside footprints (layer, text, board x,y; h text height)
BT1: Bottom Overlay "AAA size" at 139.275,108.15 h1.52 r270
CN2: Top Overlay "1" at 113.6,164.79 h0.8
CN3: Top Overlay "1" at 171.196,164.567 h0.8
CN7: Mechanical 1 "Board edge" at 148.262,177.38 h0.2 r180
CN11: Mechanical 1 "Board edge" at 174.88,97.813 h0.2 r90
Logo_ROHS: Bottom Overlay "RoHS" at 145.31,170.39 h1.6; Bottom Overlay "COMPLIANT" at 145.71,168.99 h0.8; Bottom Overlay "2002/95/EC" at 146.21,167.69 h0.8